# EAGLE board source_eagle (EAGLE 9.6.2)
REV: A
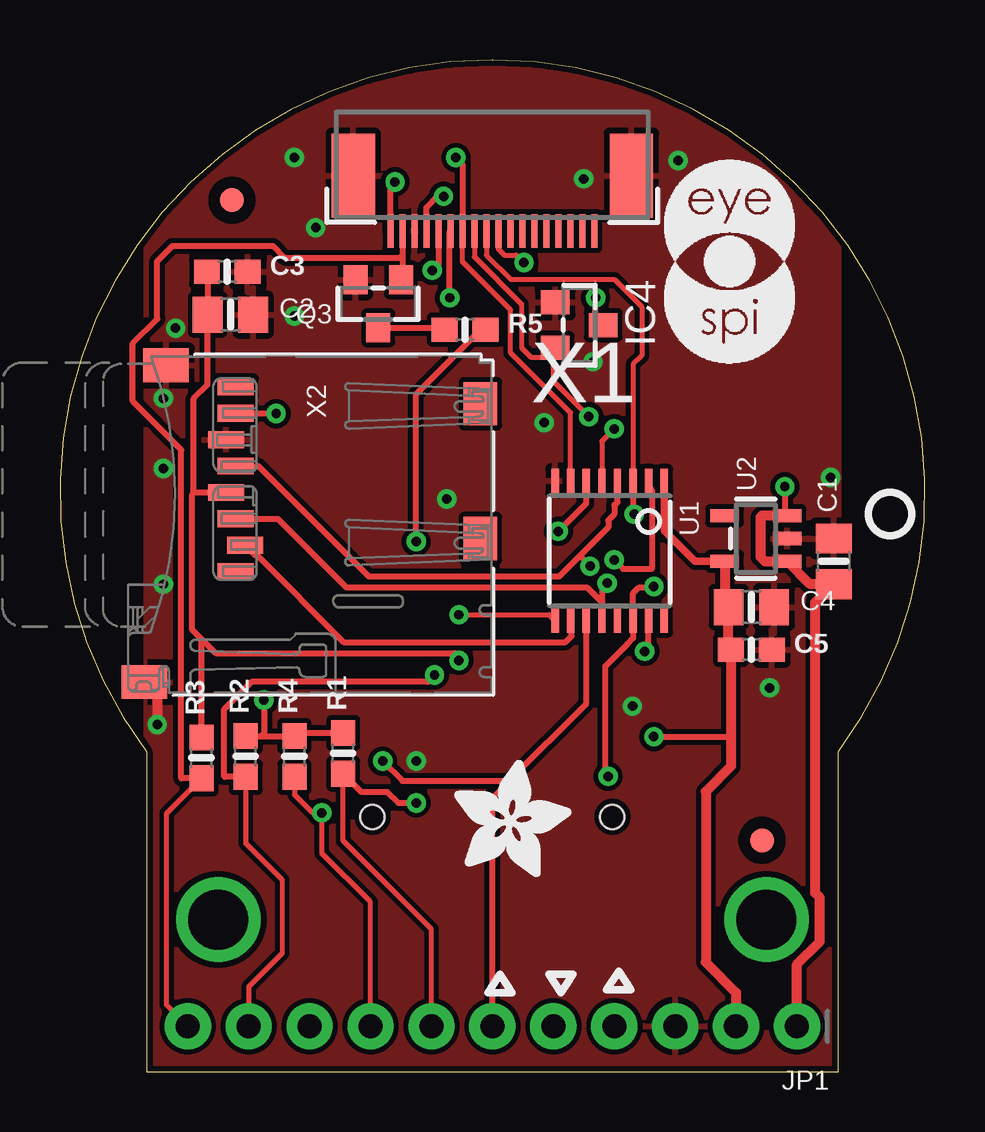
[diagram p0: board, top side]
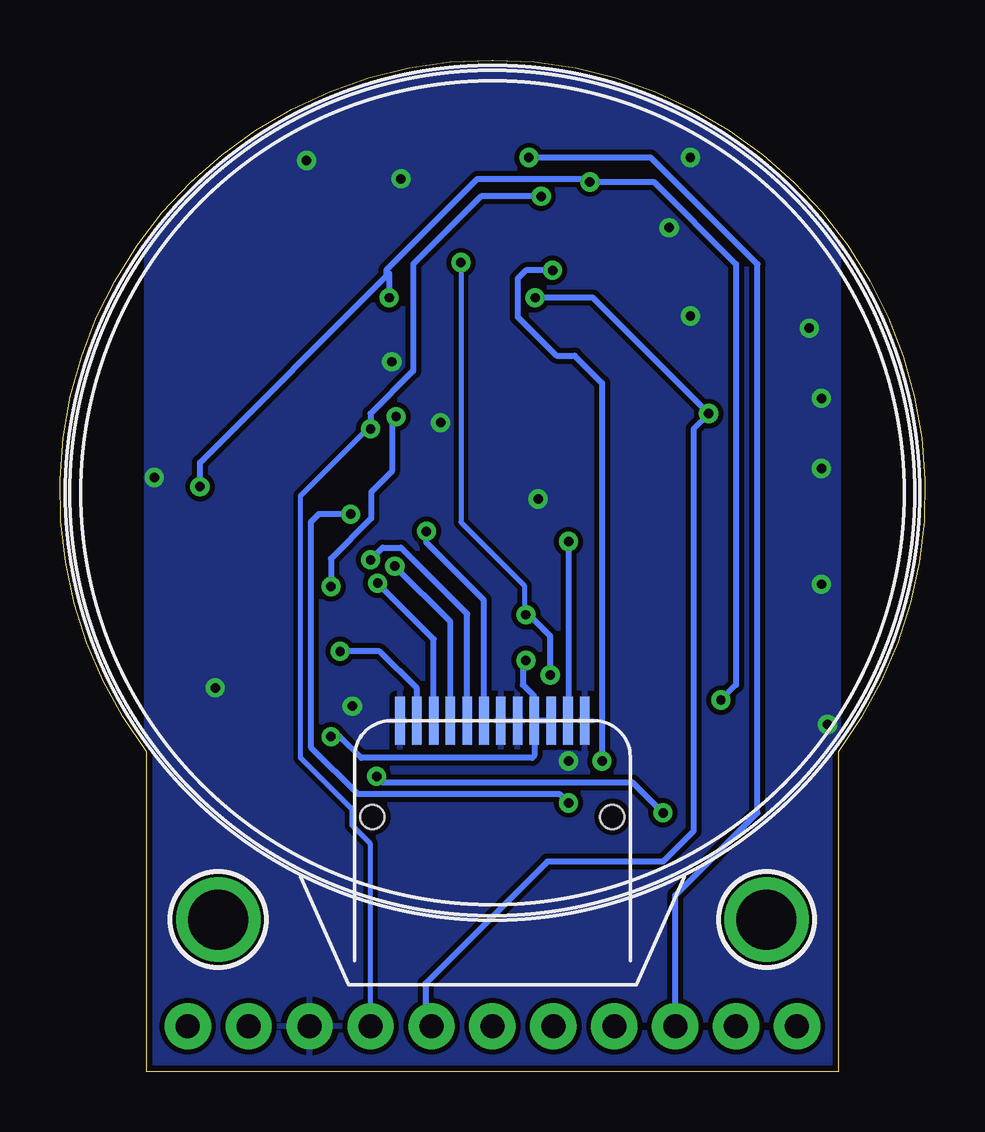
[diagram p1: board, bottom side, seen from below]

Size 36.05 x 42.16 mm. Coordinates in mm from the lower left corner, seen from the top.
Outline: 3.61,0 32.44,0 32.44,13.33 arc127 18.05,42.16 18,42.16 arc127 3.61,13.33 3.61,0
Copper layers (1*16): Top 0.035mm / dielectric 1.5mm / Bottom 0.035mm
Design rules "adafruit *": minimum track width 8mil, minimum drill 15.5mil, track to track 8mil, track to pad 8mil, pad to pad 8mil, via to via 8mil, smd to smd 8mil, copper to edge 10mil, drill to drill 8mil, minimum pad ring 10mil, minimum via ring 8mil, stop-mask expansion 2mil, vias tented up to drill 20mil, thermal gap 10mil
Net classes: 1 power: width 0.254 mm

## Footprints (pad centres in the part's own frame; a part is rotated, then mirrored left to right if it is on the bottom)
0805-NO = smd 1.24 x 1.5: 1 -0.95,0; 2 0.95,0
0603-NO = smd 1.075 x 1: 1 -0.85,0; 2 0.85,0
TFT_1.28IN_ROUND_240X240_12P = smd 0.4 x 2: 1 3.85,-9.5; 2 3.15,-9.5; 3 2.45,-9.5; 4 1.75,-9.5; 5 1.05,-9.5; 6 0.35,-9.5; 7 -0.35,-9.5; 8 -1.05,-9.5; 9 -1.75,-9.5; 10 -2.45,-9.5; 11 -3.15,-9.5; 12 -3.85,-9.5 | hole 1: -5,-13.5; 5,-13.5
SOT23-WIDE = smd 1 x 1.2: 1 -0.95,-1; 2 0.95,-1; 3 0,1
1X11_ROUND_76 = drill 1 pad 1.93: 1 -12.7,0; 2 -10.16,0; 3 -7.62,0; 4 -5.08,0; 5 -2.54,0; 6 0,0; 7 2.54,0; 8 5.08,0; 9 7.62,0; 10 10.16,0; 11 12.7,0
TSSOP16 = smd 0.305 x 0.991: 1 -2.275,-2.918; 2 -1.625,-2.918; 3 -0.975,-2.918; 4 -0.325,-2.918; 5 0.325,-2.918; 6 0.975,-2.918; 7 1.625,-2.918; 8 2.275,-2.918; 9 2.275,2.918; 10 1.625,2.918; 11 0.975,2.918; 12 0.325,2.918; 13 -0.325,2.918; 14 -0.975,2.918; 15 -1.625,2.918; 16 -2.275,2.918
SOT23-5 = smd 0.55 x 1.2: 1 -0.95,-1.3; 2 0,-1.3; 3 0.95,-1.3; 4 0.95,1.3; 5 -0.95,1.3
FIDUCIAL_1MM = smd 1 x 1: 1 0,0
MOUNTINGHOLE_2.5_PLATED = drill 2.5 pad 3.2: P$1 0,0
EYE_SPI_DISPLAY_BOTCONTACT = smd 0.25 x 1.4: 1 4.25,1.154; 2 3.75,1.154; 3 3.25,1.154; 4 2.75,1.154; 5 2.25,1.154; 6 1.75,1.154; 7 1.25,1.154; 8 0.75,1.154; 9 0.25,1.154; 10 -0.25,1.154; 11 -0.75,1.154; 12 -1.25,1.154; 13 -1.75,1.154; 14 -2.25,1.154; 15 -2.75,1.154; 16 -3.25,1.154; 17 -3.75,1.154; 18 -4.25,1.154 | smd 1.8 x 3.5: SUPPORT1 -5.8,-1.152; SUPPORT2 5.8,-1.152
MICROSD = smd 0.7 x 1.5: 1 1.761,-3.147; 2 0.661,-2.747; 3 -0.439,-3.147; 4 -1.539,-3.547; 5 -2.639,-3.147; 6 -3.739,-3.547; 7 -4.839,-3.147; 8 -5.939,-3.147 | smd 1.8 x 1.4: CD1 -5.239,7.053; CD2 0.38,7.053 | smd 1.4 x 1.9: MT1 -6.839,-6.047; MT2 6.361,-6.947

## Placement (x,y rotation side)
C1  10uF  [0805-NO]  32.25,21.27 90 top
C2  10uF  [0805-NO]  7.11,31.56 0 top
C3  0.1uF  [0603-NO]  6.98,33.34 0 top
C4  10uF  [0805-NO]  28.82,19.37 0 top
C5  0.1uF  [0603-NO]  28.82,17.59 0 top
DISP1  DISP_LCD_GENERIC_SPI_1.28_240X240_ROUND  [TFT_1.28IN_ROUND_240X240_12P]  18.03,24.13 0 bottom
IC4  APX803-SAG  [SOT23-WIDE]  21.65,31.11 270 top
JP1  [1X11_ROUND_76]  18.03,1.9 180 top
PLABEL0  [PLABEL0]  31.55,3.18 90 top
PLABEL1  [PLABEL1]  13.77,3.18 90 top
PLABEL2  [PLABEL2]  11.23,3.18 90 top
PLABEL3  [PLABEL3]  9.71,3.56 0 top
PLABEL4  [PLABEL4]  16.31,7.24 90 top
PLABEL5  [PLABEL5]  18.85,4.57 90 top
PLABEL6  [PLABEL6]  23.81,4.45 90 top
PLABEL7  [PLABEL7]  21.39,4.32 90 top
PLABEL8  [PLABEL8]  5.14,3.05 90 top
PLABEL13  [PLABEL13]  26.35,3.18 90 top
PLABEL14  [PLABEL14]  27.11,3.18 0 top
PLABEL15  [PLABEL15]  31.87,3.62 0 bottom
PLABEL16  [PLABEL16]  29.08,3.62 0 bottom
PLABEL17  [PLABEL17]  26.28,3.75 0 bottom
PLABEL23  [PLABEL23]  11.55,3.75 0 bottom
PLABEL24  [PLABEL24]  8.88,3.75 0 bottom
PLABEL25  [PLABEL25]  5.84,3.75 0 bottom
PLABEL26  [PLABEL26]  21.96,25.15 0 top
PLABEL27  [PLABEL27]  22.98,13.97 0 top
PLABEL28  [PLABEL28]  18.54,15.24 0 top
Q3  BSS138  [SOT23-WIDE]  13.26,32 180 top
R1  10K  [0603-NO]  11.8,13.27 90 top
R2  10K  [0603-NO]  7.74,13.14 90 top
R3  10K  [0603-NO]  5.9,13.08 90 top
R4  10K  [0603-NO]  9.77,13.14 90 top
R5  10  [0603-NO]  16.88,30.92 0 top
U1  74HC4050PWR  [TSSOP16]  22.92,21.72 180 top
U2  AP2112K-3.3  [SOT23-5]  29.01,22.22 90 top
U$1  [ADAFRUIT_5MM]  16.44,8.13 0 top
U$2  [PCBFEAT-REV-040]  34.6,23.24 180 top
U$4  FIDUCIAL_1MM  [FIDUCIAL_1MM]  29.27,9.65 270 top
U$5  FIDUCIAL_1MM  [FIDUCIAL_1MM]  7.17,36.32 0 top
U$7  [EYESPI_MINI_LOGO]  25.14,29.46 0 top
U$9  MOUNTINGHOLE2.5  [MOUNTINGHOLE_2.5_PLATED]  29.46,6.35 270 bottom
U$10  MOUNTINGHOLE2.5  [MOUNTINGHOLE_2.5_PLATED]  6.6,6.35 270 bottom
X1  EYE_SPI_DISPLAY_FLIP  [EYE_SPI_DISPLAY_BOTCONTACT]  18.03,36.2 180 top
X2  MicroSD  [MICROSD]  10.47,22.61 270 top

## Library data of the parts
C1-C5 JP1 R1-R5 U1 U$1 U$2 = microbuilder
DISP1 = adafruit_display
IC4 Q3 = microbuilder; ROT: 270
PLABEL0 PLABEL1-PLABEL8 PLABEL13-PLABEL17 PLABEL23-PLABEL28 = pinguin
U2 = adafruit_power; JLC_ROTATION: 0
U$4 U$5 = microbuilder; BOM: EXCLUDE
U$7 = silks
U$9 U$10 = adafruit_electromech; BOM: EXCLUDE
X1 = adafruit_display; LCSC: C2856802
X2 = adafruit_electromech; JLC_ROTATION: 90; LCSC: C125617

## Nets
+3V3 [power]: C2.1 C3.1 C4.1 C5.1 DISP1.3 DISP1.4 JP1.2 R3.2 U1.1 U2.5 X2.4
CARDCS: JP1.10 R2.1 U1.9 X1.10
CARDCS_3V: U1.10 X2.2
GND: C1.2 C2.2 C3.2 C4.2 C5.2 DISP1.1 DISP1.5 DISP1.6 DISP1.12 IC4.1 JP1.3 Q3.2 U1.8 U2.2 X1.3 X1.SUPPORT1 X1.SUPPORT2 X2.6 X2.MT1 X2.MT2
LEDK: DISP1.2 R5.2
LITE: JP1.11 Q3.1 R3.1 X1.2
MISO: JP1.5 X1.6 X2.7
MOSI: JP1.6 U1.11 X1.5
MOSI_3V: DISP1.10 U1.12 X2.3
N$1: Q3.3 R5.1
SCK: JP1.4 U1.5 X1.4
SCK_3V: DISP1.9 U1.4 X2.5
TFTCS: JP1.7 R1.1 U1.3 X1.9
TFTCS_3V: DISP1.8 U1.2
TFTDC: JP1.9 U1.7 X1.7
TFTDC_3V: DISP1.7 U1.6
TFTRST: IC4.2 JP1.8 R4.1 U1.14 X1.8
TFTRST_3V: DISP1.11 U1.15
VIN [power]: C1.1 IC4.3 JP1.1 R1.2 R2.2 R4.2 U2.1 U2.3 X1.1

## Tracks (layer width: path | path; a pad name or v marks a point on that pad's centre or on a via)
+3V3  (via drill 0.39)
  Top 0.254: X2.4 6.91,24.13 5.58,24.13 | 5.58,24.13 5.58,28.07 6.16,28.64 C2.1 6.16,33.31 C3.1 | R3.2 5.9,18.03 | 5.58,24.13 5.52,24.07 5.52,18.41 5.9,18.03 | v24.76,13.97 27.97,13.97 | 5.9,18.03 6.48,17.45 16.45,17.45 16.63,17.27 v16.63,17.14
  Top 0.305: U1.1 25.19,22.55 26.47,21.27 U2.5
  Top 0.406: U2.5 27.71,19.53 C4.1 27.87,17.69 C5.1 27.97,13.97 27.97,12.74 26.92,11.68 26.92,4.57 28.19,3.3 JP1.2
  Bottom 0.254: DISP1.3 DISP1.4 | DISP1.4 16.28,13.18 16.38,13.08 23.49,13.08 24.38,13.97 v24.76,13.97 | v16.63,17.14 16.76,17.02 16.76,16.13 16.28,15.65 DISP1.4
CARDCS  (via drill 0.39)
  Top 0.203: R2.1 7.74,9.52 9.26,8 9.26,4.95 7.87,3.56 JP1.10 | v19.34,33.73 19.03,34.04 18.53,34.04 18.28,34.28 X1.10 | v16.63,19.05 20.39,19.05 U1.9
  Top 0.254: R2.1 6.88,12.29 6.85,12.32 6.85,15.11 7.99,16.26 15.33,16.26 v15.61,16.54
  Bottom 0.203: v19.34,33.73 19.34,22.9 16.69,20.26 16.69,19.11 v16.63,19.05 16.57,19.11
  Bottom 0.254: v15.61,16.54 15.61,18.16 16.57,19.11
CARDCS_3V
  Top 0.254: X2.2 8.14,21.52 8.21,21.52 11.83,17.91 21.08,17.91 21.33,18.16 21.33,18.76 U1.10
GND  (via drill 0.39)
  Top 0.406: X2.MT2 4.06,15.71 v4.06,14.48
  other vias: 4.82,30.99 9.77,31.5 9.77,38.1 25.77,37.97 21.84,37.21 22.22,29.59 32.12,24.77 29.58,16 14.85,12.95 16.12,23.88 20.19,27.05 23.87,15.24 10.66,35.18 4.31,20.32 4.31,28.07 4.31,25.15
  pour Top: 3.61,42.16 32.44,42.16 32.44,0 3.61,0
  pour Bottom: 3.61,42.16 32.44,42.16 32.44,0 3.61,0
LEDK  (via drill 0.39)
  Top 0.254: v14.85,22.1 14.85,28.24 17.54,30.92 R5.2
  Bottom 0.254: v14.85,22.1 14.85,14.65 DISP1.2
LITE
  Top 0.203: JP1.11 4.44,2.79 4.44,10.77 R3.1
  Top 0.254: X1.2 14.28,34.04 | 14.28,34.04 14.28,33.07 Q3.1 | R3.1 5.06,12.23 5.06,25.92 3.04,27.94 3.04,30.35 4.06,31.37 4.06,33.78 4.69,34.42 8.88,34.42 9.37,33.93 14.18,33.93 14.28,34.04
MISO  (via drill 0.39)
  Top 0.254: X2.7 9,27.45 v9.01,27.43 | v16.25,32.26 16.25,35.01 X1.6
  Bottom 0.254: v16.25,32.26 13.84,32.26 v9.01,27.43 9.65,26.8 9.65,10.03 10.92,8.76 15.74,8.76 20.82,3.68 20.82,2.16 JP1.5
MOSI  (via drill 0.39)
  Top 0.254: JP1.6 18.03,11.43 18.73,12.13 | U1.11 21.94,15.34 18.73,12.13 | X1.5 15.78,33.66 v15.52,33.4 | v13.46,12.95 14.28,12.13 18.73,12.13
  Bottom 0.254: v15.52,33.4 16.63,33.4 16.98,33.05 16.98,31.46 15.36,29.84 14.6,29.84 13.46,28.7 v13.46,12.95
MOSI_3V  (via drill 0.39)
  Top 0.254: X2.3 9.08,23.04 11.93,20.19 21.96,20.19 22.59,19.57 | 22.59,19.57 U1.12 | v22.81,20.36 22.59,20.15 22.59,19.57
  Bottom 0.254: DISP1.10 20.48,18.03 v22.81,20.36
N$1
  Top 0.254: Q3.3 15.96,31 R5.1
SCK  (via drill 0.39)
  Top 0.203: v23.11,26.8 22.59,26.28 U1.5
  Top 0.254: X1.4 15.28,36.02 15.74,36.48 v16,36.48
  Bottom 0.203: JP1.4 23.11,9.5 23.88,10.28 23.88,10.94 26.03,13.08 26.03,24 23.23,26.8 v23.11,26.8
  Bottom 0.254: v16,36.48 18.5,36.48 21.33,33.66 21.33,29.21 23.11,27.43 v23.11,26.8
SCK_3V  (via drill 0.39)
  Top 0.254: X2.5 8.28,25.24 12.87,20.65 20.82,20.65 21.74,21.56 | 21.74,21.56 22.86,22.69 22.86,22.98 23.12,23.24 23.12,23.62 23.24,23.75 U1.4 | v22.1,21.07 21.74,21.44 21.74,21.56
  Bottom 0.254: DISP1.9 19.78,18.75 v22.1,21.07
TFTCS  (via drill 0.39)
  Top 0.203: JP1.7 15.49,5.94 11.8,9.63 R1.1 | X1.9 17.78,34.04 18.8,33.02 23.11,33.02 24.25,31.88 24.25,29.84 23.89,29.49 U1.3
  Top 0.254: R1.1 12.57,11.66 13.65,11.66 14.11,11.21 v14.85,11.21 | U1.3 23.89,23.29 v23.94,23.24
  Bottom 0.254: v14.85,11.21 15.23,11.59 23.65,11.59 25.6,13.54 25.6,22.91 25.27,23.24 v23.94,23.24
TFTCS_3V  (via drill 0.39)
  Top 0.254: v23.11,21.34 23.49,20.95 24.67,20.95 24.67,24.25 24.54,24.38 U1.2
  Bottom 0.254: DISP1.8 19.08,19.08 21.84,21.84 22.6,21.84 v23.11,21.34
TFTDC  (via drill 0.39)
  Top 0.203: U1.7 21.29,27.47 18.79,29.97 18.79,31.75 16.78,33.76 X1.7
  Top 0.254: v16.5,38.1 16.78,37.83 X1.7
  Bottom 0.254: JP1.9 10.41,7.37 6.98,10.79 6.98,33.66 11.42,38.1 v16.5,38.1
TFTDC_3V  (via drill 0.39)
  Top 0.254: v20.78,22.52 21.94,23.69 U1.6
  Bottom 0.254: DISP1.7 18.38,19.65 20.78,22.05 v20.78,22.52
TFTRST  (via drill 0.39)
  Top 0.203: JP1.8 12.95,7.09 10.92,9.12 v10.92,10.79 10.53,10.79 9.77,11.56 R4.1 | X1.8 17.28,33.96 19.25,31.99 19.25,30.16 19.63,29.78 20.57,29.78 | IC4.2 20.57,30.16 20.57,29.78 | v22.04,27.3 20.57,28.78 20.57,29.78
  Top 0.254: v22.85,12.32 22.73,12.45 22.73,16.89 23.65,17.81 23.65,17.83 23.89,18.07 U1.14 23.89,19.94 24.12,20.17 24.71,20.17 v24.76,20.22
  Bottom 0.254: v22.85,12.32 22.6,12.06 12.19,12.06 v10.92,10.79 | v22.04,27.3 22.22,27.3 22.22,25.02 23.08,24.16 23.08,23.07 24.76,21.39 v24.76,20.22
TFTRST_3V  (via drill 0.39)
  Top 0.254: v24.38,17.53 24.54,17.69 U1.15
  Bottom 0.254: DISP1.11 21.18,15.98 22.73,17.53 v24.38,17.53
VIN  (via drill 0.39)
  Top 0.254: R2.2 8.38,13.99 | 8.38,13.99 R4.2 9.9,14.12 R1.2 | X1.1 13.78,36.9 v13.96,37.08 | v30.22,24.38 30.22,23.18 | v8.5,15.49 8.5,14.12 8.38,13.99 | IC4.3 22.33,31.43 v22.33,32.26
  Top 0.406: JP1.1 30.73,4.48 31.68,5.43 31.68,7.27 31.49,7.46 31.49,19.56 C1.1 31.27,20.32 U2.1 29.39,21.27 29.2,21.46 29.2,23.11 29.26,23.18 30.22,23.18 U2.3
  Bottom 0.254: v30.22,24.38 30.22,25.39 22.46,33.15 | 22.46,33.15 22.33,33.27 v22.33,32.26 | 22.46,33.15 22.46,33.4 18.65,37.21 14.09,37.21 v13.96,37.08 11.3,37.08 7.87,33.66 7.87,16.13 v8.5,15.49

## Text on the board
Pinguin_tBackup: MOSI | MISO | SCK | Lite | SDCS | DC | RST | TFTCS | Gnd | 3Vo | Vin | 1.28" Round / TFT 240x240 | GC9A01A | Vlogic/Vin:3.3~5VDC
Pinguin_bBackup: BL | CC | DC | RT | TC | SI | SO | CK | G | 3V | V+